# Altium PCB Notecarier-F.PcbDoc (part 2 of 3)
Units mm, origin at the board's own origin, x right, y up, seen from the top; angles counter-clockwise.
Board outline 50.8 x 103 mm, 4 copper layers (Top Layer, Mid Layer 3, Mid Layer 4, Bottom Layer), stack 1.58 mm thick; 105 components, 115 nets, 561 pads, 506 vias.
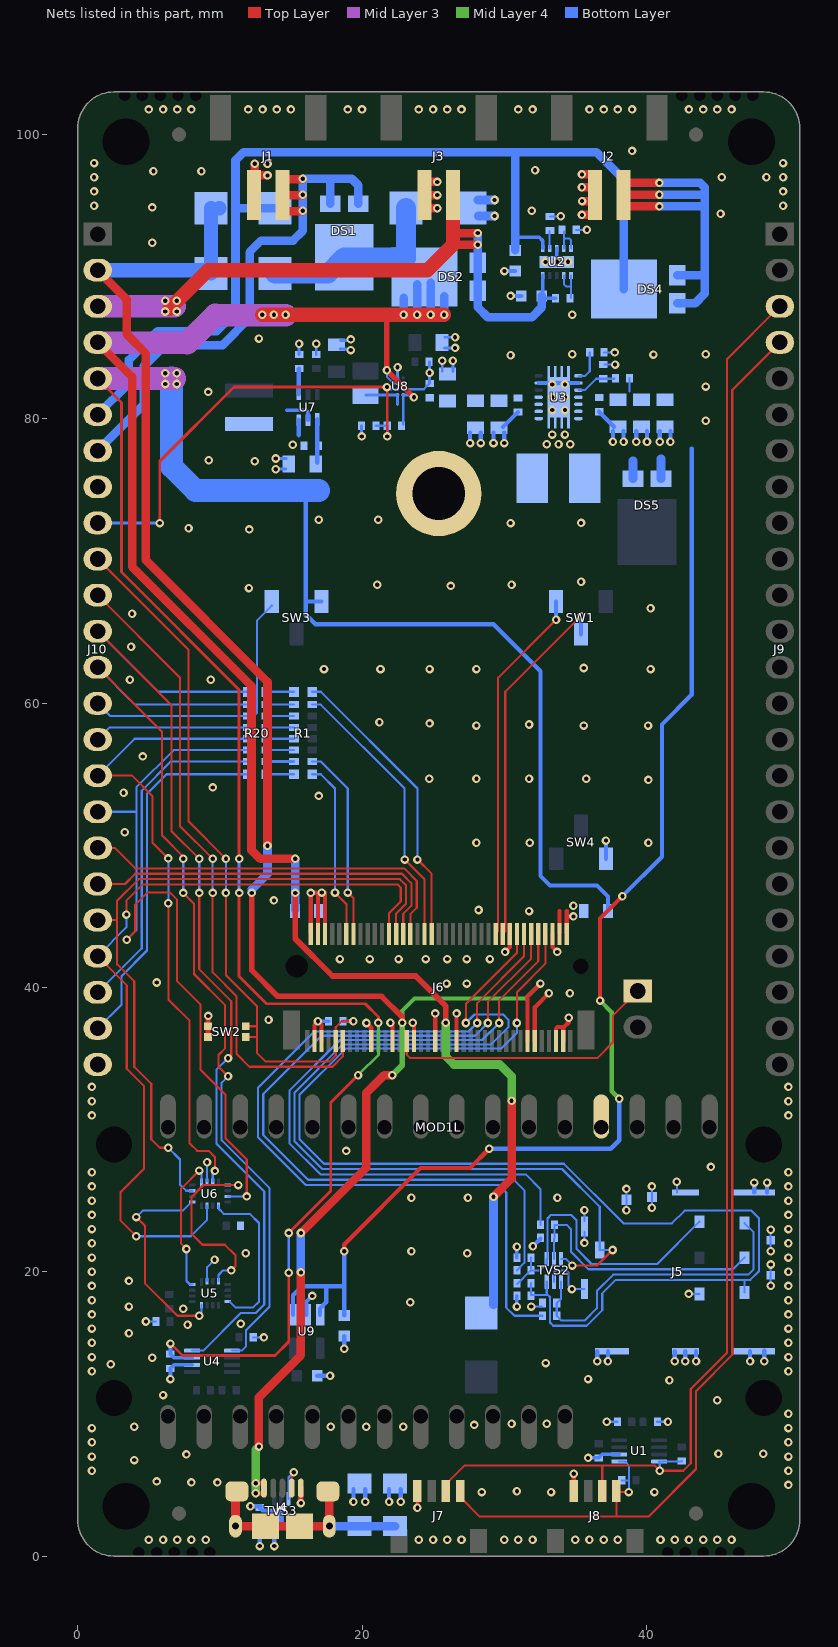
[diagram p4: the nets of this part, all layers, seen from the top]

## Via types
v1: diameter 0.6, hole 0.3, Top Layer to Bottom Layer, tented both sides, 506 vias

## Nets (pads, with @x,y where several pads share a name; then routed paths per layer and width w, separated by ;. In a path a pad name is that pad's centre, name@x,y a point inside that pad or via, vN(x,y) a via of type N, cw(c..) or ccw(c..) an arc to the next point about the centre after c; other vN are vias at no path point) (continued)
GND: C1.1 C2.1 C3.2 C4.2 C5.1 C6.1 C7.1 C8.1 C9.1 C10.1 C11.2 C12.2 C13.2 C14.2 C15.1 C16.1 C17.1 C18.1 C19.1 C20.2 C21.1 C22.2 C23.2 C24.2 C25.1 C26.1 C27.1 C28.1 C29.2 C30.1 C31.1 C32.1 C33.1 C34.1 J1.1 J2.1 J3.1 J4.5 J5.5 J5.8 J5.9 J5.10 J5.11 J5.12 J5.14 J5.15 J5.16 J5.17 J5.18 J5.19 J6.3 J6.5 J6.6 J6.11 J6.18 J6.33 J6.39 J6.45 J6.51 J6.57 J6.71 J6.73 J7.4 J8.4 J10.8 J10.24 MOD1L.4 OBJ1.1 R3.1 R4.1 R5.2 R14.1 R16.2 R17.2 SW2.2 SW4.1 TVS1.2 TVS2.2 TVS3.2 U1.2 U2.3 U2.11 U3.2 U3.13 U3.15 U4.2 U5.2 U6.2 U7.3 U8.B2 U8.D1 U9.2 | length 114.3
  Top Layer w0.3: J6.73@16.65,36.225 16.65,37.375 v1(16.9,37.625) 17.15,37.375 J6.71@17.15,36.225 ; v1(20.311,37.5) 20.65,37.161 J6.57@20.65,36.225 ; J6.51@22.15,36.225 v1@22.15,37.525 ; J6.45@23.65,36.225 v1@23.65,37.525 ; v1(23.9,3.389) J7.4@23.9,4.589 ; J6.39@25.15,36.225 v1(25.15,38.175) ; J6.33@26.65,36.225 v1(26.65,38.175) ; v1(30.061,42.5) 30.4,42.839 J6.18@30.4,43.775 ; J6.11@32.15,36.225 32.15,38.6 v1(33.15,39.6) ; J6.6@33.4,43.775 33.4,42.839 v1(33.739,42.5) ; J6.5@33.65,36.225 33.65,37.1 33.761,37.211 34.211,37.211 34.55,37.55 v1(34.55,37.875) ; J6.3@34.15,36.225 34.15,37.15 ; J8.4@34.9,4.589 v1(34.9,5.789)
  Top Layer w0.35: SW2.2@9.175,36.525 SW2.2@9.175,37.275 v1(9.175,38)
  Top Layer w0.4: v1(15.7,3.725) J4.5@15.7,4.775
  Top Layer w0.6: J1.1@12.45,97.05 v1(12.45,97.95) ; J1.1@12.45,97.125 v1(13.35,97.125) ; J3.1@24.3,94.825 v1(25.3,94.825) ; J3.1@24.3,95.75 v1(25.3,95.75) ; J3.1@24.3,96.675 v1(25.3,96.675) ; v1(35.475,94.35) J2.1@36.55,94.35 ; v1(35.475,96.3) J2.1@36.55,96.3 ; v1(35.475,97.2) J2.1@36.55,97.2 ; v1(35.483,95.325) J2.1@36.558,95.325
  Bottom Layer w0.15: v1(4.8,16.5) C15.1@5.5,16.5 ; U5.2@9.1,19.345 9.1,20.32 v1(9.625,20.845) ; U6.2@9.1,26.345 v1(9.1,27.695) ; C14.2@12.35,15.375 v1(13.1,15.375) ; U8.B2@22.9,82.09 24.35,82.09 C26.1@24.75,82.49 ; v1(31.9,17.55) C7.1@32.653,17.55 ; R3.1@33.225,94.25 v1(33.975,94.25) ; TVS2.2@33.5,19.295 33.5,19.95 33.65,20.1 34.35,20.1 34.525,19.925 34.525,19.025 v1(34.77,18.78) J5.14@35.65,18.78 ; R4.1@35.075,93.3 v1(35.825,93.3) ; v1(35.65,22.03) J5.12@35.65,22.78 ; J5.12@35.65,23.58 v1(35.65,24.33) ; C18.1@37.025,84.675 v1(37.775,84.675) ; R14.1@37.05,83.825 v1(37.8,83.825) ; v1(37.225,9.45) C12.2@37.975,9.45 ; v1(38.6,24.325) J5.11@38.6,25.075 v1(38.6,25.825) ; v1(40.4,24.5) J5.10@40.4,25.25 v1(40.4,26) ; R16.2@40.775,9.45 v1(41.525,9.45) ; J5.9@42.15,25.575 v1(42.15,26.325) ; v1(42.98,18.44) J5.5@43.73,18.44 ; v1(48.75,19.01) J5.18@48.75,19.76 v1(48.75,20.51) ; v1(48.75,21.45) J5.19@48.75,22.2 v1(48.75,22.95)
  Bottom Layer w0.2: v1@13.89,76.465 C29.2@14.64,76.465 ; v1(13.925,77.215) C29.2@14.675,77.215 ; R17.2@15.575,84.54 v1(15.575,85.29) ; C28.1@16.775,84.54 v1(16.775,85.29) ; C21.1@18.45,84.915 v1@19.2,84.915 ; C21.1@18.485,85.515 v1@19.235,85.515 ; v1(19.975,78.765) C31.1@19.975,79.515 ; U8.D1@22.5,82.89 v1(22.5,83.64) ; C32.1@24.725,84.015 24.75,83.99 v1(24.75,83.24) C26.1@24.75,82.49 ; C27.1@25.65,83.375 v1@25.65,84.125 ; C20.2@25.8,84.99 v1(26.55,84.99) ; C20.2@25.835,85.74 v1@26.585,85.74 ; C27.1@26.4,83.34 v1(26.4,84.09)
  Bottom Layer w0.25: v1(6.525,12.45) C13.2@6.525,13.2 6.775,13.45 U4.2@8.045,13.45 ; v1(16.9,37.625) C9.1@17.65,37.625 ; v1(30.9,17.55) C5.1@30.9,18.3 ; C8.1@30.9,21 v1(30.9,21.75) ; U3.13@32.425,82.525 U3.2@35.225,82.525 ; v1(33.703,91.047) U2.3@33.703,91.997 ; v1(35.9,6.9) C11.2@36.65,6.9 36.9,7.15 U1.2@38.095,7.15
  Bottom Layer w0.3: v1(12.15,3.5) C3.2@12.9,3.5 ; C3.2@12.8,3.4 13,3.2 14.15,3.2 14.325,3.025 TVS3.2@14.325,2.395 ; U9.2@16.097,16.975 16.097,17.897 v1(16.5,18.3) ; C34.1@16.85,12.675 v1(17.75,12.675) ; v1(18.75,14.575) C33.1@18.75,15.475 ; v1(19.4,3.825) C4.2@19.4,4.701 ; v1(20.225,3.825) C4.2@20.225,4.701 ; v1(21.9,3.825) R5.2@21.9,4.701 ; v1(22.725,3.825) R5.2@22.725,4.701 ; v1(27.6,78.3) C17.1@27.6,79.05 ; v1(28.35,78.3) C17.1@28.35,79.05 ; v1(29.25,78.3) C16.1@29.25,79.05 ; C16.1@29.925,79.425 C30.1@30.975,80.475 ; v1(30,78.3) C16.1@30,79.05 ; v1(30.02,90.4) C1.1@30.77,90.4 ; v1(30.45,88.65) C2.1@31.2,88.65 ; v1(32.025,21.8) C6.1@32.55,22.325 ; v1(36.55,13.7) J5.15@36.55,14.4 ; C25.1@36.675,80.5 C23.2@37.725,79.45 ; SW4.1@37.158,49.056 v1(37.158,50.331) ; v1(37.3,13.7) J5.15@37.3,14.4 ; v1(37.65,78.4) C23.2@37.65,79.15 ; v1(38.4,78.4) C23.2@38.4,79.15 ; v1(39.3,78.4) C24.2@39.3,79.15 ; v1(40.05,78.4) C24.2@40.05,79.15 ; v1(40.95,78.4) C22.2@40.95,79.15 ; v1(41.7,78.4) C22.2@41.7,79.15 ; v1(42,13.7) J5.16@42,14.4 ; v1(42.75,13.7) J5.16@42.75,14.4 ; v1(43.5,13.7) J5.16@43.5,14.4 ; v1(47.3,13.7) J5.17@47.3,14.4 ; J5.8@47.6,25.575 v1(47.6,26.275) ; v1(48.3,13.7) J5.17@48.3,14.45 ; J5.8@48.5,25.575 v1(48.5,26.275)
  Bottom Layer w0.35: 15.55,78.865 U7.3@15.55,79.915
  Bottom Layer w0.6: TVS1.2@28.16,95.4 v1(29.325,95.4) ; TVS1.2@28.165,94.275 v1(29.325,94.275)
  other v1: 5,1.15 6,1.15 7,1.15 8,1.15 9,1.15 24,1.15 25,1.15 26,1.15 27,1.15 30,1.15 31,1.15 32,1.15 35,1.15 36,1.15 37,1.15 38,1.15 41,1.15 42,1.15 43,1.15 44,1.15 45,1.15 46,1.15 28.425,4.5 33.3,4.5 40.575,4.5 30.9,4.55 50,5 8,5.175 9.825,5.175 5.55,5.25 1,6 50,6 3.975,6.75 1,7 50,7 7.65,7.15 45.075,7.2 48.225,7.2 1,8 50,8 1,9 50,9 3.975,9.1 17.8,9.1 20.3,9.1 22.9,9.1 27.9,9.225 30.525,9.3 33,9.3 50,10 45,10.95 6,11.325 41.625,12.375 35.9,12.45 1,13 50,13 2.325,13.5 32.925,13.575 5.25,13.95 1,14 50,14 1,15 50,15 3.6,15.675 1,16 50,16 7.725,16.275 11.475,16.35 1,17 50,17 7.425,17.4 3.6,17.55 23.4,17.85 1,18 50,18 1,19 50,19 3.6,19.35 1,20 50,20 1,21 50,21 11.825,21.3 27.4,21.3 23.475,21.45 1,22 50,22 1,23 50,23 1,24 50,24 1,25 50,25 23.475,25.2 27.45,25.2 33.75,25.2 1,26 50,26 1,27 50,27 44.55,27.375 18.9,28.5 1,31 50,31 1,32 50,32 1,33 50,33 22,37.525 23.575,37.525 13.425,37.725 34.625,39.6 25.95,40.275 27.375,40.275 5.55,40.35 18.45,42 20.55,42 22.575,42 24.475,42 26,42 27.375,42 29,42 31.75,45.375 28.2,45.45 13.8,46.125 28.05,50.175 31.8,50.175 40.15,50.175 3.3,50.925 16.95,53.475 3.225,53.7 9.49,54.075 40.15,54.6 24.725,54.675 28.05,54.675 31.75,54.675 35.775,54.675 4.575,56.25 28.05,58.425 35.6,58.425 40.125,58.425 31.75,58.5 24.75,58.575 21.225,58.65 3.675,61.65 9.35,61.65 17.325,62.4 21.3,62.4 24.75,62.4 28.05,62.4 40.3,62.4 35.6,62.475 3.75,63.975 3.825,66.3 40.3,66.675 12.045,68.1 26.25,68.25 21.075,68.325 30.525,68.325 35.408,68.55 12.075,72.225 7.8,72.3 30.45,72.675 35.408,72.68 16.95,72.9 21.15,72.9 13.925,76.465 12.45,77.025 9.225,77.1 15.125,78.19 33,78.225 33.825,78.225 34.65,78.225 33.375,78.9 34.275,78.9 44.175,79.875 33.375,80.625 34.275,80.625 33.375,81.525 34.275,81.525 9.175,81.9 44.175,82.275 33.375,82.425 34.275,82.425 25.65,84.09 30.45,84.47 40.5,84.525 34.8,84.545 44.175,84.545 19.2,84.84 19.2,85.59 12.75,85.65 26.55,85.74 34.8,87.32 32.906,91.044 34.5,91.05 5.25,92.4 45.225,94.425 31.95,94.65 5.25,94.875 1.15,95 49.625,95 1.15,96 49.625,96 1.15,97 45.3,97 48.45,97 49.625,97 5.325,97.425 8.7,97.425 32.175,97.5 13.35,97.95 1.15,98 49.625,98 39,98.85 5,101.775 6,101.775 7,101.775 8,101.775 12,101.775 13,101.775 14,101.775 15,101.775 19,101.775 20,101.775 24,101.775 25,101.775 26,101.775 27,101.775 31,101.775 32,101.775 36,101.775 37,101.775 38,101.775 39,101.775 43,101.775 44,101.775 45,101.775 46,101.775
N_ATTN: J10.14 R20.6 SW3.1 | length 19.6
  Bottom Layer w0.15: J10.14@1.4,59.98 2.28,59.1 R20.6@11.975,59.1 12.4,59.1 12.6,59.3 12.6,65.8 SW3.1@13.65,66.85
N_AUX1: J6.46 J10.18 | length 27.3
  Top Layer w0.15: J10.18@1.4,49.82 2.605,49.82 4.05,48.375 22.966,48.375 23.85,47.491 23.85,45.6 23.4,45.15 J6.46@23.4,43.775
N_AUX2: J6.48 J10.19 | length 26.4
  Top Layer w0.15: J10.19@1.4,47.28 3.33,47.28 4.05,48 22.811,48 23.475,47.336 23.475,45.75 22.9,45.175 J6.48@22.9,43.775
N_AUX3: J6.50 J10.20 U6.15 | length 49.4
  Top Layer w0.15: J10.20@1.4,44.74 2.735,44.74 ; v1(6.375,28.725) 5.775,28.725 5.175,29.325 5.175,33.225 3.975,34.425 3.975,40.425 2.775,41.625 2.775,46.115 4.285,47.625 22.655,47.625 23.1,47.18 23.1,45.9 22.4,45.2 J6.50@22.4,43.775
  Bottom Layer w0.15: v1(6.375,28.725) 7.2,27.9 7.2,26.125 7.625,25.7 U6.15@8.055,25.7
N_AUX4: J6.52 J10.21 U6.11 | length 56.9
  Top Layer w0.15: J10.21@1.4,42.2 3.45,40.15 3.45,34.275 4.65,33.075 4.65,27.225 3,25.575 3,23.625 v1(4.125,22.5) ; v1(3.425,45.125) 3.425,46.1 4.575,47.25 22.5,47.25 22.725,47.025 22.725,46.05 21.9,45.225 J6.52@21.9,43.775
  Bottom Layer w0.15: J10.21@1.4,42.2 3.425,44.225 v1(3.425,45.125) ; v1(4.125,22.5) 7.95,22.5 9.1,23.65 U6.11@9.1,24.655
N_AUX_EN: J10.15 R20.5 | length 10.9
  Bottom Layer w0.15: J10.15@1.4,57.44 2.26,58.3 R20.5@11.975,58.3
N_AUX_RX: J10.16 R20.4 U6.3 | length 45.5
  Top Layer w0.15: J10.16@1.4,54.9 3.825,54.9 5.25,53.475 5.25,50.2 v1(6.375,49.075) ; v1(6.375,45.925) 6.375,39.15 7.875,37.65 7.875,29.025 8.4,28.5 9.225,28.5 9.65,28.075 v1(9.65,27.095)
  Bottom Layer w0.15: J10.16@1.4,54.9 4,57.5 R20.4@11.975,57.5 ; v1(6.375,45.925) v1(6.375,49.075) ; U6.3@9.5,26.345 v1@9.5,27.095
N_AUX_TX: J10.17 R20.3 U6.7 | length 53.1
  Top Layer w0.15: v1(3.45,43.35) 4.05,43.95 4.05,45.825 4.9,46.675 6.5,46.675 6.975,46.2 6.975,40.475 8.625,38.825 8.625,34.23 10.395,32.46 10.395,29.4 11.895,27.9 v1(11.895,25.3)
  Bottom Layer w0.15: J10.17@1.4,52.36 4.06,52.36 ; v1(3.45,43.35) 4.125,44.025 4.125,54.075 6.75,56.7 R20.3@11.975,56.7 ; U6.7@10.545,25.3 v1(11.895,25.3)
N_BOOT: J6.65 J10.11 | length 45.5
  Top Layer w0.15: J10.11@1.4,67.6 7.2,61.8 7.2,51.34 v1(9.49,49.05) ; v1(9.49,46.65) 9.49,41.06 11.175,39.375 11.175,35.325 12.075,34.425 17.925,34.425 18.65,35.15 J6.65@18.65,36.225
  Bottom Layer w0.15: v1(9.49,46.65) v1(9.49,49.05)
N_EN: C31.2 J10.9 R19.1 U8.B1 | length 32.6
  Top Layer w0.2: v1(5.775,72.675) 5.775,77.025 10.99,82.24 v1(21.75,82.24) ; v1(21.775,78.765) v1@21.775,82.215
  Bottom Layer w0.2: J10.9@1.4,72.68 1.405,72.675 v1(5.775,72.675) ; C31.2@20.975,79.515 R19.1@21.775,79.515 v1(21.775,78.765) ; v1@21.75,82.09 U8.B1@22.5,82.09
N_NRST: C9.2 J6.67 J10.10 SW2.1 | length 51.1
  Top Layer w0.15: J10.10@1.4,70.14 7.8,63.74 7.8,51.675 v1(10.425,49.05) ; v1(10.425,46.65) 10.425,40.875 12.6,38.7 12.6,35.4 13.2,34.8 17.725,34.8 18.15,35.225 J6.67@18.15,36.225 18.15,37.2 18.575,37.625 v1(19.4,37.625) ; SW2.1@11.825,36.525 12.6,36.525 ; SW2.1@11.825,37.275 12.6,37.275
  Bottom Layer w0.15: v1(10.425,46.65) v1(10.425,49.05)
  Bottom Layer w0.25: C9.2@18.65,37.625 v1(19.4,37.625)
N_RX: J10.22 R20.2 | length 23.8
  Bottom Layer w0.15: J10.22@1.4,39.66 4.5,42.76 4.5,53.85 6.55,55.9 R20.2@11.975,55.9
N_SCL: J10.12 R20.8 U4.4 | length 71.8
  Top Layer w0.15: J10.12@1.4,65.06 6.6,59.86 6.6,51 v1(8.55,49.05) ; v1(8.55,46.65) 8.55,41.29 10.8,39.04 10.8,35.175 v1@10.65,35.025
  Bottom Layer w0.15: J10.12@1.4,65.06 5.66,60.8 R20.8@11.975,60.8 ; U4.4@8.045,14.45 8.825,14.45 11.475,17.1 12.525,17.1 13.125,17.7 13.125,25.65 9.75,29.025 9.75,34.2 v1(10.575,35.025) ; v1(8.55,46.65) v1(8.55,49.05)
N_SDA: J10.13 R20.7 U4.5 | length 67.1
  Top Layer w0.15: J10.13@1.4,62.52 5.925,57.995 5.925,50.7 v1@7.575,49.05 ; v1(7.425,46.65) 8.175,45.9 8.175,40.951 10.35,38.776 10.35,35.7 9.9,35.25 9.9,34.425 v1(10.575,33.75)
  Bottom Layer w0.15: J10.13@1.4,62.52 4.02,59.9 R20.7@11.975,59.9 ; v1(7.425,46.65) v1(7.425,49.05) ; v1(10.575,33.75) 10.125,33.3 10.125,29.25 13.5,25.875 13.5,17.55 11.85,15.9 11.85,14.75 11.55,14.45 U4.5@10.855,14.45
N_TX: J10.23 R20.1 | length 25.6
  Bottom Layer w0.15: J10.23@1.4,37.12 3.075,38.795 3.075,40.8 4.875,42.6 4.875,53.625 6.25,55 10.825,55 R20.1@11.975,55
N_VIO: C13.1 C19.2 C29.1 F1.1 J10.5 SW3.3 U4.3 U7.1 | length 168.1
  Top Layer w0.2: J10.5@1.4,82.84 3.075,81.165 3.075,69.225 11.355,60.945 v1(11.355,49.05) ; v1(6.525,14.95) 7.375,14.1 13.875,14.1 14.85,15.075 v1(14.85,19.925) ; v1(11.355,46.65) 11.355,40.785 13.29,38.85 20.225,38.85 21.15,37.925 v1(21.15,37.525) ; v1(14.85,22.725) 17.8,25.675 17.8,31.9 v1(19.725,33.825)
  Mid Layer 3 w1.6: J10.5@1.4,82.84 6.825,82.84
  Mid Layer 4 w0.2: v1@19.8,33.9 21.15,35.25 v1(21.15,37.525)
  Bottom Layer w0.2: v1(11.355,46.65) v1(11.355,49.05) ; v1(14.85,19.925) v1(14.85,22.725)
  Bottom Layer w0.25: v1(6.525,14.95) C13.1@6.525,14.2 6.775,13.95 U4.3@8.045,13.95
  Bottom Layer w0.3: 16.05,74.625 16.05,66.225 16.725,65.55 29.25,65.55 32.55,62.25 32.55,47.85 33.225,47.175 36.525,47.175 37.3,46.4 F1.1@37.3,45.375 ; 16.075,67.15 SW3.3@17.15,67.15
  Bottom Layer w0.35: C29.1@16.85,76.94 U7.1@16.85,79.965
  Bottom Layer w1.6: 6.6,82.875 6.6,76.65 8.285,74.965 16.95,74.965
  other v1: 6.15,82.455 6.975,82.455 6.15,83.205 6.975,83.205
NetC4_1: C4.1 J4.S@11.1,2.1 J4.S@11.2,4.55 J4.S@13.2,2.1 J4.S@15.6,2.1 J4.S@17.6,4.55 J4.S@17.7,2.1 R5.1 | length 16.1
  Top Layer w0.6: J4.S@11.1,4.472 J4.S@11.1,2.1 J4.S@13.2,2.1 J4.S@15.6,2.1 J4.S@17.7,2.1 17.7,4.45 J4.S@17.6,4.55
  Bottom Layer w0.6: J4.S@17.7,2.1 C4.1@19.826,2.1 R5.1@22.326,2.1
NetC6_2: C6.2 J5.2 R7.2 TVS2.5 | length 18.3
  Bottom Layer w0.15: TVS2.5@33.5,20.905 C6.2@33.5,22.35 ; C6.2@33.55,22.4 R7.2@33.55,23.3 34.4,23.3 34.7,23 34.7,21.4 35.925,20.175 46.095,20.175 J5.2@46.9,20.98
NetC7_2: C7.2 J5.3 R8.2 TVS2.1 | length 22.2
  Bottom Layer w0.15: TVS2.1@34,19.295 34,18.1 C7.2@33.7,17.8 R8.2@33.7,16.9 34.025,16.575 35.67,16.575 36.525,17.43 36.525,18.65 37.675,19.8 47.175,19.8 47.55,20.175 47.55,22.77 J5.3@46.9,23.42
NetC8_2: C8.2 J5.7 R6.1 R9.2 TVS2.4 | length 21.3
  Bottom Layer w0.15: R6.1@30.9,19.125 R9.2@31.8,20.025 ; C8.2@31.9,21 R9.2@31.9,20.1 32.55,20.1 33,20.55 TVS2.4@33,20.905 ; TVS2.4@33.05,20.905 33.05,23.75 33.3,24 34.7,24 35.1,23.6 35.1,21.6 36.15,20.55 40.76,20.55 J5.7@43.73,23.52
NetC18_2: C18.2 U3.1 | length 2.3
  Bottom Layer w0.15: U3.1@35.225,83.025 35.7,83.025 36.025,83.35 C18.2@36.025,84.675
NetC22_1: C22.1 C23.1 C24.1 C25.2 C33.2 DS5.1 DS5.2 R13.2 U3.4 U3.5 U9.1 U9.3 | length 90.3
  Top Layer w0.3: v1(18.75,21.45) 18.75,21.925 24.125,27.3 27.6,27.3 v1(28.95,28.65) ; v1(36.75,39.075) 36.75,44.85 v1(38.325,46.425)
  Mid Layer 4 w0.3: v1(36.75,39.075) 37.575,38.25 37.575,32.7 v1(38.1,32.175)
  Bottom Layer w0.15: 38.825,81.925 R13.2@38.825,82.875
  Bottom Layer w0.3: U9.1@15.147,16.975 15.147,18.347 15.775,18.975 17.475,18.975 ; U9.3@17.047,16.975 17.047,17.422 17.475,17.85 17.475,18.975 ; C33.2@18.75,16.925 18.75,18.975 ; v1(18.75,21.45) 18.75,18.975 ; v1(28.95,28.65) 37.5,28.65 38.1,29.25 v1(38.1,32.175) ; v1(38.325,46.425) 41.1,49.2 41.1,58.5 43.2,60.6 43.2,77.925 ; 17.475,18.975 18.75,18.975
  Bottom Layer w0.6: DS5.2@39.065,75.8 39.065,77.055 ; DS5.1@41.035,75.8 41.035,77.205
NetDS4_1: DS4.1 DS4.2 J2.2 | length 28.6
  Top Layer w0.6: J2.2@38.425,94.95 v1(40.925,94.95) ; J2.2@38.425,95.775 v1(40.925,95.775) ; J2.2@38.425,96.6 v1(40.925,96.6)
  Bottom Layer w0.6: v1(40.925,94.95) 44.1,94.95 ; v1(40.925,95.775) 44.025,95.775 ; v1(40.925,96.6) 43.8,96.6 44.1,96.3 44.1,88.8 43.44,88.14 DS4.1@42.175,88.14 ; DS4.2@42.175,90.11 43.99,90.11
NetF2_2: F2.2 J6.70 J6.72 J6.74 | length 10.4
  Top Layer w0.3: J6.74@16.4,43.775 v1(16.4,46.65) ; v1@16.425,46.675 v1(17.175,46.675) 17.4,46.675 J6.70@17.4,43.775 ; J6.72@16.9,43.775 v1@16.9,46.65
  Bottom Layer w0.3: v1(16.4,46.65) v1@17.15,46.65
NetJ4_4: J4.4 TVS3.6 | length 3.2
  Top Layer w0.15: J4.4@15.05,4.775 15.05,5.75 v1(15.2,5.9)
  Bottom Layer w0.15: TVS3.6@14.825,4.005 14.825,5.525 v1(15.2,5.9)
NetJ6_20: J6.20 SW1.2 | length 25.9
  Top Layer w0.15: J6.20@29.9,43.775 30.075,43.95 30.075,60.8 v1(35.4,66.125)
  Bottom Layer w0.3: SW1.2@35.4,64.85 v1(35.4,66.125)
NetJ6_22: J6.22 SW1.1 | length 25.1
  Top Layer w0.15: J6.22@29.4,43.775 29.575,43.95 29.575,61.8 v1(33.65,65.875)
  Bottom Layer w0.3: v1(33.65,65.875) SW1.1@33.65,67.15
NetJ6_40: J6.40 R1.9 | length 20.9
  Top Layer w0.15: v1(23.9,49) 24.896,48.004 J6.40@24.896,43.779
  Bottom Layer w0.15: R1.9@16.5,60.8 17.1,60.8 23.9,54 v1(23.9,49)
NetJ6_42: J6.42 R1.10 | length 19.7
  Top Layer w0.15: v1(23,49) 24.392,47.608 J6.42@24.392,43.783
  Bottom Layer w0.15: R1.10@16.5,59.9 17.1,59.9 23,54 v1(23,49)
NetL1_1: L1.1 U7.2 | length 2.1
  Bottom Layer w0.25: 14.7,80.615 16.075,80.615 16.2,80.49 U7.2@16.2,79.915
NetL2_1: L2.1 U3.6 U3.7
NetL2_2: L2.2 U3.8 U3.9
NetL3_2: L3.2 U8.A1 | length 2.9
  Bottom Layer w0.15: L3.2@20.25,81.655 L3.2@20.285,81.69
  Bottom Layer w0.2: L3.2@20.285,81.69 U8.A1@22.5,81.69 22.5,81.015
NetR1_1: R1.1 R20.16 | length 1.9
  Bottom Layer w0.15: R20.16@13.275,55 R1.1@15.2,55
NetR1_2: R1.2 R20.15 | length 1.9
  Bottom Layer w0.2: R20.15@13.275,55.9 R1.2@15.2,55.9
NetR1_3: R1.3 R20.14 | length 1.9
  Bottom Layer w0.15: R20.14@13.275,56.7 R1.3@15.2,56.7
NetR1_4: R1.4 R20.13 | length 1.9
  Bottom Layer w0.15: R20.13@13.275,57.5 R1.4@15.2,57.5
NetR1_5: R1.5 R20.12 | length 1.9
  Bottom Layer w0.15: R20.12@13.275,58.3 R1.5@15.2,58.3
NetR1_6: R1.6 R20.11 | length 1.9
  Bottom Layer w0.15: R20.11@13.275,59.1 R1.6@15.2,59.1
NetR1_7: R1.7 R20.10 | length 1.9
  Bottom Layer w0.15: R20.10@13.275,59.9 R1.7@15.2,59.9
NetR1_8: R1.8 R20.9 | length 1.9
  Bottom Layer w0.15: R20.9@13.275,60.8 R1.8@15.2,60.8
NetR2_1: R2.1 U2.6 U2.7 | length 2.8
  Bottom Layer w0.15: U2.7@34.203,90.097 34.203,89.472 34.35,89.325 34.703,89.325 ; R2.1@34.703,88.5 U2.6@34.703,90.097
NetR3_2: R3.2 U2.2 | length 1.2
  Bottom Layer w0.15: U2.2@33.203,91.997 R3.2@33.203,93.228
NetR4_2: R4.2 U2.4 U2.5 | length 2.3
  Bottom Layer w0.15: U2.4@34.203,91.997 34.203,92.7 ; R4.2@34.203,93.172 34.203,92.7 ; U2.5@34.703,91.997 34.703,92.572 34.575,92.7 34.203,92.7
NetR13_1: R13.1 R14.2 U3.3 | length 2.9
  Bottom Layer w0.15: U3.3@35.225,82.025 35.675,82.025 36.475,82.825 R14.2@36.975,82.825 R13.1@37.775,82.825
NetR17_1: R17.1 U7.4 | length 1.8
  Bottom Layer w0.3: R17.1@15.55,83.515 R17.1@15.575,83.54
  Bottom Layer w0.35: U7.4@15.55,81.745 R17.1@15.55,83.515
NetU5_4: U5.4 U6.5 | length 13.3
  Top Layer w0.15: v1(10.8,20.095) 11.1,20.395 11.1,21.15 10.35,21.9 8.775,21.9 8,22.675 8,25.25 8.85,26.1 v1(11.295,26.1)
  Bottom Layer w0.15: U5.4@9.9,19.345 9.9,19.775 10.22,20.095 v1(10.8,20.095) ; U6.5@10.545,26.1 v1(11.295,26.1)
NetU5_8: U5.8 U6.9 | length 11.4
  Bottom Layer w0.15: U6.9@9.9,24.655 9.9,24.45 10.275,24.075 12.1,24.075 12.75,23.425 12.75,17.9 12.325,17.475 11.125,17.475 U5.8@10.7,17.9
NetU5_12: U5.12 U6.13 | length 14.7
  Top Layer w0.15: v1(4.125,23.85) 4.725,23.25 4.725,19.2 7.02,16.905 v1(8.55,16.905)
  Bottom Layer w0.15: v1(4.125,23.85) 4.575,24.3 7.38,24.3 U6.13@7.98,24.9 ; v1@8.7,16.905 U5.12@8.7,17.655
NetU5_16: U5.16 U6.1 | length 9.7
  Top Layer w0.15: v1(7.65,21.6) 7.275,21.975 7.275,25.845 v1(8.55,27.12)
  Bottom Layer w0.15: v1(7.65,21.6) 7.65,19.35 7.9,19.1 U5.16@8.055,19.1 ; U6.1@8.7,26.295 v1@8.7,27.045
RTX: J6.47 J11.1 | length 20.4
  Top Layer w0.15: J6.47@23.15,36.225 23.15,35.275 23.4,35.025 36.55,35.025 37.65,36.125 37.65,38.007 J11.1@39.394,39.751
RX_P: J6.62 R1.15 | length 13.7
  Top Layer w0.15: v1(19,46.675) 19.4,46.275 J6.62@19.4,43.775
  Bottom Layer w0.15: R1.15@16.5,55.9 17.1,55.9 19,54 v1(19,46.675)
SIM_CLK: J6.14 R8.1 | length 58.1
  Top Layer w0.15: v1(28.096,37.5) 28.096,38.896 31.4,42.2 J6.14@31.4,43.53
  Bottom Layer w0.15: v1(28.096,37.5) 27.496,36.9 16.65,36.9 12.675,32.925 12.675,29.475 16.05,26.1 29.625,26.1 30.15,25.575 30.15,17.475 30.725,16.9 R8.1@32.7,16.9
SIM_IO: J6.12 R9.1 | length 54
  Top Layer w0.15: v1(28.858,37.5) 28.858,38.983 31.9,42.025 J6.12@31.9,43.688
  Bottom Layer w0.15: v1(28.858,37.5) 27.958,36.6 17.15,36.6 13.05,32.5 13.05,29.625 16.2,26.475 30.675,26.475 31.425,25.725 31.425,20.625 R9.1@30.9,20.1
SIM_NPRESENT: J5.13 J6.16 TVS2.6 | length 63.8
  Top Layer w0.15: v1(27.311,37.5) 27.311,38.861 30.9,42.45 J6.16@30.9,43.912 ; v1(34.8,20.435) 36.53,20.435 v1(37.625,21.53)
  Bottom Layer w0.15: v1(27.311,37.5) 27.911,38.1 29.925,38.1 30.3,37.725 30.3,37.2 29.1,36 18.65,36 15.246,32.596 15.246,29.179 17.2,27.225 34.075,27.225 36.725,24.575 J5.13@36.725,21.53 v1(37.625,21.53) ; TVS2.6@34,20.905 34.33,20.905 v1(34.8,20.435)
SIM_RST: J6.10 R7.1 | length 49.3
  Top Layer w0.15: v1(29.643,37.5) 29.643,39.093 32.4,41.85 J6.10@32.4,43.688
  Bottom Layer w0.15: v1(29.643,37.5) 28.443,36.3 18.45,36.3 14.893,32.743 14.893,29.032 17.075,26.85 31.525,26.85 32.55,25.825 R7.1@32.55,23.3
SIM_VCC: C5.2 J5.1 J6.8 R6.2 TVS2.3 | length 90
  Top Layer w0.15: v1(30.9,37.5) 30.9,39.675 32.9,41.675 J6.8@32.9,43.775
  Bottom Layer w0.15: v1(30.9,37.5) 30.9,36.825 29.775,35.7 18.85,35.7 15.6,32.45 15.6,29.325 17.325,27.6 34.2,27.6 38.4,23.4 41.8,23.4 42.7,24.3 47.4,24.3 47.925,23.775 47.925,20.025 47.325,19.425 46.9,19.425 ; R6.2@31.9,19.2 31.9,18.375 33.075,18.375 33.225,18.225 33.225,16.425 33.45,16.2 35.8,16.2 36.9,17.3 36.9,18.475 37.85,19.425 46.9,19.425 ; 33,18.375 TVS2.3@33,19.295 ; J5.1@46.9,18.54 46.9,19.425
SW_SCL: J7.1 J8.1 J9.4 R15.1 U1.1 | length 107
  Top Layer w0.15: J7.1@26.9,5 J7.1@26.9,4.589 26.9,4.15 28.275,2.775 40.15,2.775 43.5,6.125 43.5,11.6 46.05,14.15 46.05,82.03 J9.4@49.4,85.38 ; 37.9,2.8 J8.1@37.9,4.589 37.989,4.5 v1(38.775,4.5)
  Bottom Layer w0.15: U1.1@38.095,6.65 38.5,6.65 38.775,6.375 38.775,5.325 ; R15.1@38.275,5.325 38.775,5.325 ; v1(38.775,4.5) 38.775,5.325
SW_SDA: J7.2 J8.2 J9.3 R10.1 U1.8 | length 105.9
  Top Layer w0.15: J7.2@26.1,5.25 27.225,6.375 40.575,6.375 v1(40.95,6) 42.6,6 43.125,6.525 43.125,11.755 45.675,14.305 45.675,84.195 J9.3@49.4,87.92 ; J8.2@36.9,4.589 36.9,6.375
  Bottom Layer w0.15: U1.8@40.905,6.65 42.475,6.65 R10.1@42.5,6.675 ; v1(40.95,6) U1.8@40.95,6.605
TX_P: J6.64 R1.16 | length 12.6
  Top Layer w0.15: v1(18.1,46.675) 18.9,45.875 J6.64@18.9,43.775
  Bottom Layer w0.15: R1.16@16.5,55 17.1,55 18.1,54 v1(18.1,46.675)
V+: DS1.1 DS1.2 J1.2 J10.7 | length 40.3
  Top Layer w0.6: J1.2@14.4,94.625 v1@15.825,94.625 ; J1.2@14.4,95.75 v1@15.825,95.75 ; J1.2@14.4,96.875 v1@15.825,96.875
  Bottom Layer w0.6: J10.7@1.4,77.76 4.65,81.01 4.65,83.7 6.135,85.185 10.185,85.185 12.09,87.09 12.09,91.74 12.9,92.55 15.15,92.55 15.825,93.225 v1(15.825,96.9) 19.275,96.9 19.735,96.44 DS1.1@19.735,95.125 ; DS1.2@17.765,95.125 17.765,96.89
  other v1: 15.825,94.65 15.825,95.775
VBAT: C2.2 DS2.1 DS2.2 J3.2 J10.3 R2.2 U2.10 | length 46.6
  Top Layer w0.6: 26.4,92.25 v1(28.15,92.25) ; 26.4,93.075 v1(28.15,93.075)
  Top Layer w1: 6.45,87.75 9.16,90.46 24.61,90.46 26.4,92.25 J3.2@26.4,94.625
  Mid Layer 3 w1.6: J10.3@1.4,87.92 6.825,87.92
  Bottom Layer w0.25: C2.2@32.65,88.5 R2.2@33.625,88.5 ; C2.2@32.703,88.703 U2.10@32.703,90.097
  Bottom Layer w0.6: v1(28.15,93.075) DS2.2@28.15,90.985 DS2.1@28.15,89.015 28.15,87.846 28.846,87.15 31.95,87.15 32.65,87.85 32.65,88.5 C2.2@32.65,88.65
  other v1: 6.15,87.555 6.975,87.555 6.15,88.305 6.975,88.305
VIO_P: F1.2 J6.2 J6.4 | length 3.2
  Top Layer w0.3: J6.4@33.9,43.775 33.9,45.375 ; J6.2@34.4,43.775 34.4,45.375
  other v1: 34.875,45 34.875,45.75
VMAIN: C16.2 C17.2 C26.2 C27.2 C30.2 DS1.3 DS2.3 DS6.1 DS7.1 F2.1 J10.4 R19.2 TVS1.1 U3.10 U3.11 U8.A2 U8.C1 | length 146
  Top Layer w0.4: v1(15.3,46.65) 15.3,43.425 17.925,40.8 23.775,40.8 25.9,38.675 v1(25.9,37.525) ; 21.75,87.32 v1(21.75,83.415) v1(23.65,81.515)
  Top Layer w0.6: J10.4@1.4,85.38 3.825,82.955 3.825,69.6 12.225,61.2 12.225,49.65 12.825,49.05 v1(15.3,49.05) ; v1(29.25,25.275) 30.525,26.55 v1(30.525,32.025)
  Top Layer w1: v1(12.975,87.32) 21.75,87.32 v1(25.775,87.32)
  Mid Layer 3 w1.6: J10.4@1.4,85.38 7.706,85.345 9.698,87.316 v1@14.625,87.288
  Mid Layer 4 w0.6: v1(25.9,37.525) 25.9,35.15 26.47,34.58 29.695,34.58 30.525,33.75 v1(30.525,32.025)
  Bottom Layer w0.15: v1(21.75,83.415) 21.75,82.965 22.225,82.49 U8.C1@22.5,82.49
  Bottom Layer w0.2: R19.2@22.9,79.64 U8.A2@22.9,81.69 v1@23.7,81.69
  Bottom Layer w0.6: F2.1@15.3,45.475 v1(15.3,49.05) ; v1(22.925,87.32) DS2.3@22.925,88.525 ; v1(23.875,87.32) DS2.3@23.875,89.475 ; v1(24.825,87.32) DS2.3@24.825,89.575 ; v1(25.775,87.32) DS2.3@25.775,88.625 ; DS6.1@29.25,17.675 v1(29.25,25.275)
  Bottom Layer w1.4: DS7.1@13.875,90.225 17.6,90.225 DS1.3@18.75,91.375 DS2.3@23.025,91.375 ; DS2.3@23.1,91.3 TVS1.1@23.1,94.84
  other v1: 13.8,87.32 14.625,87.32
VSOLAR: C1.2 DS3.1 DS4.3 J10.6 U2.1 | length 72.3
  Bottom Layer w0.25: 30.77,92.775 32.475,92.775 32.703,92.547 U2.1@32.703,91.997
  Bottom Layer w0.6: J10.6@1.4,80.3 3.6,82.5 3.6,84.15 5.625,86.175 9.775,86.175 11.1,87.5 11.1,98.2 11.675,98.775 36.475,98.775 38.425,96.825 DS4.3@38.425,89.125 ; 11.125,94.825 DS3.1@13.875,94.825 ; C1.2@30.77,91.85 30.77,92.775 30.77,98.4
VUSB: C3.1 DS3.2 DS7.2 J4.1 J6.13 J10.2 TVS3.3 | length 137.7
  Top Layer w0.3: v1(12.525,4.425) J4.1@13.1,4.425 ; v1(12.525,5.125) J4.1@13.1,5.125 ; J6.13@31.65,36.225 31.65,39.375 v1(32.55,40.275)
  Top Layer w0.4: v1(12.25,46.65) 12.25,41.2 14.075,39.375 21.375,39.375 22.825,37.925 v1(22.825,37.525)
  Top Layer w0.6: J10.2@1.4,90.46 3.45,88.41 3.45,85.95 4.8,84.6 4.8,70.05 13.35,61.5 v1(13.35,49.97) ; v1(12.75,7.7) 12.75,11.175 15.7,14.125 v1(15.7,19.95) ; v1(15.7,22.725) 20.311,27.336 20.311,32.588 21.548,33.825 v1(22.125,33.825)
  Mid Layer 4 w0.3: v1(22.825,37.525) 22.825,38.35 23.7,39.225 31.5,39.225 v1(32.55,40.275)
  Mid Layer 4 w0.4: v1(22.125,33.825) 22.825,34.525 v1(22.825,37.525)
  Mid Layer 4 w0.6: v1(12.525,4.425) v1(12.525,5.125) 12.525,7.475 v1(12.75,7.7)
  Bottom Layer w0.3: v1(12.8,0.7) C3.1@12.8,2.4 ; v1(13.825,0.7) TVS3.3@13.825,2.395
  Bottom Layer w0.6: v1(12.25,46.65) 12.25,46.9 13.35,48 v1(13.35,49.97) ; v1(15.7,19.95) v1(15.7,22.725)
  Bottom Layer w1: J10.2@1.4,90.46 9.14,90.46 DS7.2@9.375,90.225 DS3.2@9.375,94.825
pads on no net: FD1.1 FD2.1 FD3.1 FD4.1 FD5.1 FD6.1 FD7.1 FD8.1 J1.M J2.M J3.M J4.S@11.1,2.1 J4.S@17.7,2.1 J5.6 J6. J6.1 J6.15 J6.17 J6.19 J6.21 J6.23 J6.24 J6.25 J6.26 J6.27 J6.28 J6.29 J6.30 J6.31 J6.35 J6.37 J6.44 J6.53 J6.55 J6.59 J6.61 J6.63 J6.66 J6.68 J6.69 J6.75 J6.AH J7.M J8.M SW1.3 TVS3.1 U2.9 U3.14 U8.D2 U9.4

## Polygon pours and split planes (outlines as drawn)
GND on Top Layer "Top Layer-GND" (solid, remove dead copper, pour order 37): 0,0 50.8,0 50.8,103 0,103
GND on Bottom Layer "Bottom Layer-GND" (solid, remove dead copper, pour order 39): 0,0 50.8,0 50.8,103 0,103
GND on Mid Layer 3 "Mid Layer 3-GND" (solid, remove dead copper, pour order 41): 0,0 50.8,0 50.8,103 0,103
GND on Mid Layer 4 "Mid Layer 4-GND" (solid, remove dead copper, pour order 43): 0,0 50.8,0 50.8,103 0,103

## Keep-outs
Keep-Out Layer:
  circle w0.2: c35.4,41.5 r0.55
  circle w0.2: c15.4,41.5 r0.8
  circle w0.2: c2.54,28.96 r1.5
  circle w0.2: c48.266,11.116 r1.5
  circle w0.2: c48.266,28.96 r1.5
  circle w0.2: c3.4,99.5 r1.9
  circle w0.2: c47.4,99.5 r1.9
  circle w0.2: c2.546,11.116 r1.5
  circle w0.2: c3.4,3.5 r1.9
  circle w0.2: c47.4,3.5 r1.9
  lines w0.2: 0,2.54 ccw(c2.54,2.54) 2.54,0 48.26,0 ccw(c48.26,2.54) 50.8,2.54 50.8,100.46 ccw(c48.26,100.46) 48.26,103 2.54,103 ccw(c2.54,100.46) 0,100.46 0,2.54

## Other copper
Top Layer:
  region net VIO_P: 35.175,46.05 33.703,46.05 33.703,44.7 35.175,44.7
Mid Layer 4:
  region net VUSB: 14.1,0.375 12.525,0.375 12.525,3.075 12.675,3.225 12.675,3.775 12.225,4.225 12.225,5.4 14.1,5.4
Bottom Layer:
  rectangle net NetC22_1: 38.325,76.725 43.2,77.625
  rectangle net F_BAT: 39,68.175 41.1,70.725
  region net 1V8: 20.55,83.94 17.775,83.94 17.775,82.815 20.55,82.815
  region net VIO_P: 36.075,46.05 34.575,46.05 34.575,44.7 36.075,44.7
  rectangle net NetF2_2: 16.65,45.825 17.325,46.675
  pour cut-out: 13.875,82.59 10.25,82.59 10.25,78.99 13.875,78.99
  region net N_VIO: 18.975,82.465 17.32,82.465 17.32,79.41 17.15,79.24 16.55,79.24 16.55,77.553 16.55,74.14 18.975,74.14
  region net 1V8: 18.975,82.765 18.975,84.265 17.675,84.265 17.225,83.815 16.025,83.815 16.025,82.765
  region net GND: 16.4,77.815 16.4,79.24 15.35,79.24 14.675,78.565 13.625,78.565 13.625,77.815
  region net 1V8: 10.288,81.49 13.775,81.49 14.35,80.915 15.05,80.915 15.05,82.84 10.288,82.84
  region net NetL1_1: 10.288,80.14 13.775,80.14 14.375,80.74 15.05,80.74 15.05,79.24 14.6,78.79 10.288,78.79
  region net 1V8: 19.35,82.815 19.35,84.245 19.725,84.62 19.725,85.965 24.225,85.965 24.225,84.535 23.855,84.165 21.525,84.165 21.15,83.79 21.15,82.815
  region net NetL3_2: 19.35,80.115 19.35,82.24 21.15,82.24 21.15,81.765 22.05,81.765 22.05,81.521 22.331,81.24 22.6,81.24 22.6,80.115
  region net VMAIN: 22.8,80.07 22.8,81.24 23.1,81.24 23.325,81.465 23.325,81.865 26.925,81.865 26.925,80.3 26.695,80.07
  region net NetC22_1: 34.875,81.675 35.85,81.675 36.45,82.275 43.35,82.275 43.35,77.55 42.3,77.55 42.3,80.325 37.725,80.325 37.125,80.925 34.875,80.925
  region net NetL2_1: 34.875,80.7 34.875,79.5 35.325,79.05 35.325,74.1 36.975,74.1 36.975,79.725 36.825,79.875 36.2,79.875 36,80.075 36,80.7
  region net NetL2_2: 32.775,80.7 32.775,79.5 32.325,79.05 32.325,74.1 30.675,74.1 30.675,79.725 30.825,79.875 31.45,79.875 31.65,80.075 31.65,80.7
  region net GND: 33.135,80.1 34.515,80.1 34.515,79.445 35.025,78.935 35.025,77.85 32.625,77.85 32.625,78.935 33.135,79.445
  region net VMAIN: 32.775,81.675 31.9,81.675 31.5,82.09 27.15,82.09 26.925,81.865 26.925,80.3 29.925,80.3 30.525,80.9 32.775,80.9
  pour cut-out: 30.9,73.875 36.725,73.875 36.725,77.575 30.9,77.575
  pour cut-out: 21.15,83.94 19.35,83.94 19.35,81.09 21.15,81.09

## Silkscreen, mask and mechanical layers (free items; w line width, h text height)
Top Overlay:
  drawing of 7 lines, arcs and shapes, not listed
  text "+" at 15.7,95.1 h3 r270
  text "+" at 27.7,95.1 h3 r270
  text "+" at 39.7,95.1 h3 r270
  text "-" at 9.7,93.7 h3
  text "-" at 21.7,93.7 h3
  text "-" at 33.7,93.7 h3
  text "F_3V3" at 3.375,92.475 h2.29
  text "F_NRST" at 41.602,92.432 h2.29
  text "V+" at 9.825,91.925 h2.29
  text "VBAT" at 21.75,91.925 h2.29
  text "SOLAR" at 33.825,91.925 h2.29
  text "VUSB" at 3.402,89.902 h2.29
  text "F_EN" at 43.65,89.86 h2.29
  text "SDA" at 44.275,87.32 h2.29
  text "VBAT" at 3.402,87.288 h2.29
  text "NOTECARRIER-F" at 14.638,86.49 h4
  text "VMAIN" at 3.402,84.748 h2.29
  text "SCL" at 44.475,84.695 h2.29
  text "V1.3" at 22.867,84.306 h4
  text "F_D5" at 43.798,82.278 h2.29
  text "N_VIO" at 3.402,82.209 h2.29
  text "F_D6" at 43.801,79.731 h2.29
  text "VSOLAR" at 3.4,79.669 h2.29
  text "F_D9" at 43.828,77.193 h2.29
  text "V+" at 3.402,77.128 h2.29
  text "F_D10" at 43.174,74.654 h2.29
  text "GND" at 3.375,74.625 h2.29
  text "F_D11" at 43.552,72.113 h2.29
  text "N_EN" at 3.402,72.058 h2.29
  text "F_D12" at 43.18,69.565 h2.29
  text "N_NRST" at 3.402,69.542 h2.29
  text "F_D13" at 43.219,67.039 h2.29
  text "N_BOOT" at 3.402,67.004 h2.29
  text "F_B0" at 43.766,64.494 h2.29
  text "N_SCL" at 3.402,64.462 h2.29
  text "F_TX" at 43.695,61.953 h2.29
  text "N_SDA" at 3.402,61.922 h2.29
  text "F_RX" at 43.646,59.413 h2.29
  text "N_ATTN" at 3.402,59.383 h2.29
  text "F_MISO" at 42.08,56.884 h2.29
  text "AUX_EN" at 3.4,56.849 h2.29
  text "F_MOSI" at 42.104,54.334 h2.29
  text "AUX_RX" at 3.4,54.309 h2.29
  text "F_SCK" at 42.644,51.792 h2.29
  text "AUX_TX" at 3.4,51.769 h2.29
  text "F_A5" at 43.709,49.258 h2.29
  text "AUX1" at 3.4,49.229 h2.29
  text "F_A4" at 43.622,46.713 h2.29
  text "AUX2" at 3.4,46.682 h2.29
  text "F_A3" at 43.725,44.179 h2.29
  text "AUX3" at 3.4,44.149 h2.29
  text "AUX4" at 3.4,41.609 h2.29
  text "F_A2" at 43.687,41.625 h2.29
  text "RTX" at 38,41.4 h1.8
  text "F_A1" at 44.058,39.093 h2.29
  text "N_RX" at 3.402,39.063 h2.29
  text "F_A0" at 43.68,36.554 h2.29
  text "N_TX" at 3.402,36.523 h2.29
  text "CTX" at 38,34.2 h1.8
  text "F_AREF" at 41.629,34.013 h2.29
  text "GND" at 3.375,33.975 h2.29
  text "N_NRST" at 8.05,33.9 h1.8
  text "F_B0" at 5.659,28.16 h2.29 r270
  text "F_TX" at 8.199,28.16 h2.29 r270
  text "F_RX" at 10.748,28.16 h2.29 r270
  text "F_MISO" at 13.279,28.16 h2.29 r270
  text "F_MOSI" at 15.819,28.16 h2.29 r270
  text "F_SCK" at 18.359,28.16 h2.29 r270
  text "F_A5" at 20.899,28.16 h2.29 r270
  text "F_A4" at 23.439,28.16 h2.29 r270
  text "F_A3" at 25.979,28.16 h2.29 r270
  text "F_A2" at 28.519,28.16 h2.29 r270
  text "F_A1" at 31.059,28.16 h2.29 r270
  text "F_A0" at 33.599,28.16 h2.29 r270
  text "GND" at 36.139,28.16 h2.29 r270
  text "F_AREF" at 38.688,28.16 h2.29 r270
  text "F_3V3" at 41.219,28.16 h2.29 r270
  text "F_NRST" at 43.768,28.16 h2.29 r270
  text "F_SDA" at 5.659,18.309 h2.29 r270
  text "F_SCL" at 8.199,17.307 h2.29 r270
  text "F_BAT" at 33.608,17.26 h2.29 r270
  text "F_D5" at 10.739,17.079 h2.29 r270
  text "F_D10" at 18.359,16.968 h2.29 r270
  text "F_D11" at 20.899,16.968 h2.29 r270
  text "F_D13" at 25.979,16.969 h2.29 r270
  text "VUSB" at 28.519,16.969 h2.29 r270
  text "F_D12" at 23.439,16.963 h2.29 r270
  text "F_EN" at 31.068,16.809 h2.29 r270
  text "F_D6" at 13.279,15.896 h2.29 r270
  text "F_D9" at 15.819,15.896 h2.29 r270
  text "NOTECARD USB" at 10.2,5.9 h1.6
  text "QWIIC" at 23.7,5.9 h1.6
  text "QWIIC" at 34.7,5.9 h1.6
Bottom Overlay:
  lines w0.2: 37.875,35.925 37.875,41.025 40.875,41.025 40.875,35.925 37.875,35.925
  text "V+" at 17.441,99.504 h2
  text "VBAT" at 29.406,99.477 h2
  text "SOLAR" at 40.944,99.45 h2
  text "2.5V - 5.5V" at 17.441,97.654 h2
  text "3.3V - 4.2V" at 29.406,97.627 h2
  text "3.5V - 7V" at 40.944,97.6 h2
  text "F_3V3" at 7.875,92.475 h2.29
  text "F_NRST" at 47.398,92.432 h2.29
  text "VUSB" at 7.425,89.875 h2.29
  text "F_EN" at 47.4,89.85 h2.29
  text "SDA" at 47.35,87.32 h2.29
  text "VBAT" at 7.501,87.288 h2.29
  text "VMAIN" at 8.182,84.748 h2.29
  text "SCL" at 47.325,84.695 h2.29
  text "F_D5" at 47.398,82.278 h2.29
  text "N_VIO" at 7.742,82.209 h2.29
  text "F_D6" at 47.398,79.731 h2.29
  text "VSOLAR" at 9.525,79.68 h2.29
  text "F_D9" at 47.398,77.193 h2.29
  text "V+" at 5.165,77.128 h2.29
  text "F_D10" at 47.398,74.654 h2.29
  text "GND" at 6.375,74.625 h2.29
  text "F_D11" at 47.398,72.113 h2.29
  text "N_EN" at 7.288,72.058 h2.29
  text "F_D12" at 47.398,69.565 h2.29
  text "N_NRST" at 9.375,69.542 h2.29
  text "F_D13" at 47.398,67.039 h2.29
  text "N_BOOT" at 9.353,67.004 h2.29
  text "F_B0" at 47.398,64.494 h2.29
  text "N_SCL" at 8.229,64.462 h2.29
  text "N_ATTN" at 11.2,62.3 h1.6 r270
  text "FEATHER_EN" at 18.2,62.3 h1.2
  text "ON" at 18.354,62.3 h1.6 r270
  text "ACTIVE" at 31.2,62.3 h1.6 r270
  text "GPS ANT." at 38.2,62.3 h1.6
  text "PASSIVE" at 38.354,62.3 h1.6 r270
  text "F_TX" at 47.398,61.953 h2.29
  text "N_SDA" at 8.412,61.922 h2.29
  text "F_RX" at 47.398,59.413 h2.29
  text "N_ATTN" at 9.399,59.383 h2.29
  text "F_MISO" at 47.398,56.874 h2.29
  text "AUX_EN" at 9.472,56.849 h2.29
  text "F_MOSI" at 47.398,54.334 h2.29
  text "AUX_RX" at 9.517,54.309 h2.29
  text "F_SCK" at 47.398,51.792 h2.29
  text "AUX_TX" at 9.467,51.769 h2.29
  text "F_A5" at 47.398,49.258 h2.29
  text "AUX1" at 7.099,49.229 h2.29
  text "F_A4" at 47.398,46.713 h2.29
  text "DFU" at 31.2,46.7 h1.6 r270
  text "AUX" at 37.9,46.7 h1.6
  text "NORMAL" at 38.3,46.7 h1.6 r270
  text "AUX2" at 7.47,46.682 h2.29
  text "F_A3" at 47.398,44.179 h2.29
  text "AUX3" at 7.432,44.149 h2.29
  text "AUX4" at 7.535,41.609 h2.29
  text "F_A2" at 47.398,41.625 h2.29
  text "RTX" at 40.725,41.325 h1.8
  text "F_A1" at 47.398,39.093 h2.29
  text "N_RX" at 7.332,39.063 h2.29
  text "F_A0" at 47.398,36.554 h2.29
  text "N_TX" at 7.283,36.523 h2.29
  text "CTX" at 40.65,34.2 h1.8
  text "F_AREF" at 47.398,34.013 h2.29
  text "GND" at 6.375,33.975 h2.29
  text "SIM" at 40.4,26.1 h3
Top Paste:
  rectangle: 11.65,93.75 13.15,97.5
  rectangle: 13.65,93.75 15.15,97.5
  rectangle: 23.65,93.75 25.15,97.5
  rectangle: 25.65,93.75 27.15,97.5
  rectangle: 35.65,93.75 37.15,97.5
  rectangle: 37.65,93.75 39.15,97.5
M4 Enclosure:
  lines w0.2: 3.05,103 ccw(c3.05,104) 3.05,105 ; 4.05,-2 ccw(c4.05,-1) 4.05,0 ; 8.55,103 cw(c8.55,104) 8.55,105 ; 9.55,-2 cw(c9.55,-1) 9.55,0 ; 41.25,-2 ccw(c41.25,-1) 41.25,0 ; 42.25,103 ccw(c42.25,104) 42.25,105 ; 46.75,-2 cw(c46.75,-1) 46.75,0 ; 47.75,103 cw(c47.75,104) 47.75,105 ; -2,2.54 ccw(c2.54,2.54) 2.54,-2 48.26,-2 ccw(c48.26,2.54) 52.8,2.54 52.8,100.46 ccw(c48.26,100.46) 48.26,105 2.54,105 ccw(c2.54,100.46) -2,100.46 -2,2.54 ; 0,2.54 ccw(c2.54,2.54) 2.54,0 48.26,0 ccw(c48.26,2.54) 50.8,2.54 50.8,100.46 ccw(c48.26,100.46) 48.26,103 2.54,103 ccw(c2.54,100.46) 0,100.46 0,2.54
M11 Gerber Spec:
  drawing of 235 lines, arcs and shapes, not listed
  text "PCB requirements" at 128.155,125.765 h1
  text "List of Gerber files" at 171.555,125.765 h1
  text "Parameter" at 125.655,122.765 h1
  text "Value" at 144.755,122.765 h1
  text "File" at 164.455,122.765 h1
  text "No." at 158.155,121.765 h1
  text "Description" at 176.955,121.765 h1
  text "Generated" at 193.555,121.765 h1
  text "extension" at 162.155,120.665 h1
  text "Material" at 114.755,119.765 h1
  text "FR-4 (Tg 140)" at 137.755,119.765 h1
  text "Number of layers" at 114.755,116.765 h1
  text "4" at 137.755,116.765 h1
  text "1." at 158.355,116.765 h1
  text "GTP" at 165.055,116.765 h1
  text "Top Solder Paste" at 172.055,116.765 h1
  text "Board thickness" at 114.755,113.765 h1
  text "1.6 (±0.1) mm" at 137.755,113.765 h2.2
  text "2." at 158.355,113.765 h1
  text "GTO" at 165.055,113.765 h1
  text "Top Overlay (Silk)" at 172.055,113.765 h1
  text "Solder mask" at 114.755,110.765 h1
  text "Black" at 137.755,110.765 h1
  text "3." at 158.555,110.765 h1
  text "GTS" at 165.055,110.765 h1
  text "Top Solder Mask" at 172.055,110.765 h1
  text "HAL (with lead)" at 141.055,107.765 h1
  text "4." at 158.555,107.765 h1
  text "GTL" at 165.055,107.765 h1
  text "Top Layer" at 172.055,107.765 h1
  text "Surface finishing" at 114.755,104.765 h1
  text "HAL (lead-free)" at 141.055,104.765 h1
  text "5." at 158.555,104.765 h1
  text "G1" at 165.055,104.765 h1
  text "Mid Layer 1" at 172.055,104.765 h1
  text "ENIG" at 141.055,101.765 h1
  text "6." at 158.555,101.765 h1
  text "G2" at 165.055,101.765 h1
  text "Mid Layer 2" at 172.055,101.765 h1
  text "other:" at 141.055,98.765 h1
  text "7." at 158.555,98.765 h1
  text "GBL" at 165.055,98.765 h1
  text "Bottom Layer" at 172.055,98.765 h1
  text "Silkscreen top" at 114.755,95.765 h1
  text "White" at 137.755,95.765 h1
  text "8." at 158.555,95.765 h1
  text "GBS" at 165.055,95.765 h1
  text "Bottom Solder Mask" at 172.055,95.765 h1
  text "Silkscreen bottom" at 114.755,92.765 h1
  text "White" at 137.755,92.765 h1
  text "9." at 158.555,92.765 h1
  text "GBO" at 165.055,92.765 h1
  text "Bottom Overlay (Silk)" at 172.055,92.765 h1
  text "Min. track/spacing" at 114.755,89.765 h1
  text "0.15 mm" at 137.755,89.765 h1
  text "10." at 158.555,89.765 h1
  text "GBP" at 165.055,89.765 h1
  text "Bottom Solder Paste" at 172.055,89.765 h1
  text "Min. hole size" at 114.755,86.765 h1
  text "0.3 mm" at 137.755,86.765 h1
  text "11." at 158.555,86.765 h1
  text "GM10" at 165.055,86.765 h1
  text "Bottom PSM" at 172.055,86.765 h1
  text "Board dimension" at 114.755,83.765 h1
  text "103x50.8 (±0.2) mm" at 137.755,83.765 h2.2
  text "12." at 158.555,83.765 h1
  text "GM15" at 165.055,83.765 h1
  text "Board Layer" at 172.055,83.765 h1
  text "Panelization" at 114.755,80.765 h1
  text "No" at 137.755,80.765 h1
  text "13." at 158.555,80.765 h1
  text "GM8" at 165.055,80.765 h1
  text "Milling" at 172.055,80.765 h1
  text "RoHS compatibility" at 114.755,77.765 h1
  text "Yes" at 137.755,77.765 h1
  text "14." at 158.555,77.765 h1
  text "GM9" at 165.055,77.765 h1
  text "V-Cut" at 172.055,77.765 h1
  text "Number of Gerber Files" at 114.755,74.765 h1
  text "15" at 137.755,74.765 h1
  text "15." at 158.555,74.765 h1
  text "TXT" at 165.055,74.765 h1
  text "Round holes" at 172.055,74.765 h1
  text "16." at 158.555,71.765 h1
  text "TXT" at 165.055,71.765 h1
  text "Slot holes" at 172.055,71.765 h1
  text "17." at 158.555,68.765 h1
  text "TX1" at 165.055,68.765 h1
  text "Round holes" at 172.055,68.765 h1
  text "18." at 158.555,65.765 h1
  text "DRR" at 165.055,65.765 h1
  text "NCDrill file report" at 172.055,65.765 h1
  text "19." at 158.555,62.765 h1
  text "GM11" at 165.055,62.765 h1
  text "Gerbers Specification" at 172.055,62.765 h1
  text "20." at 158.555,59.765 h1
  text "GM16" at 165.055,59.765 h1
  text "Sheet Top" at 172.055,59.765 h1
  text "Additional requests" at 124.755,47.315 h1
  text "Via in pad" at 133.755,44.315 h1
  text "Half holes/castellated edges" at 133.755,41.315 h1
  text "Plated edge" at 133.755,38.315 h1
  text "Impedance control" at 133.755,35.315 h1
  text "Blind vias" at 133.755,32.315 h1
  text "Other:" at 133.755,27.815 h1
  text "Layer stack up details" at 147.355,16.115 h1
  text "Copper" at 145.755,13.115 h1
  text "Dielectric" at 155.555,13.115 h1
  text "Dielectric" at 168.555,13.115 h1
  text "Dielectric" at 180.855,13.115 h1
  text "Layer name" at 127.755,12.115 h1
  text "thickness" at 144.055,10.715 h1
  text "height" at 157.355,10.715 h1
  text "material" at 169.455,10.715 h1
  text "type" at 183.755,10.715 h1
  text "Top Layer (GTL)" at 124.755,4.115 h1
  text "0.035 mm" at 144.555,4.115 h1
  text "0.1 mm" at 157.255,1.115 h1
  text "FR-4" at 170.355,1.115 h1
  text "Prepreg" at 182.355,1.115 h1
  text "Mid Layer 1 (G1)" at 124.755,-1.885 h1
  text "0.0175 mm" at 144.555,-1.885 h1
  text "1.265 mm" at 157.255,-4.885 h1
  text "FR-4" at 170.355,-4.885 h1
  text "Core" at 182.355,-4.885 h1
  text "Mid Layer 2 (G2)" at 124.755,-7.885 h1
  text "0.0175 mm" at 144.555,-7.885 h1
  text "0.1 mm" at 157.255,-10.885 h1
  text "FR-4" at 170.355,-10.885 h1
  text "Prepreg" at 182.355,-10.885 h1
  text "Bottom Layer (GBL)" at 124.755,-13.885 h1
  text "0.035 mm" at 144.555,-13.885 h1
  text "Gerber specification" at 143.75,-29.785 h1.52
  text "PART NO.:" at 129.87,-40.43 h1.14
  text ".PCB_Num" at 143.25,-41.535 h1.52
M13 Assy Top Comm:
  text "Assembly drawing comments - TOP" at 143.75,-29.685 h1.52
  text "BOM NO.:" at 129.87,-40.43 h1.14
  text ".PCBA_BOM_Num" at 143.25,-41.535 h1.52
M14 Assy Bot Comm:
  text "Assembly drawing comments - BOTTOM" at -16.125,-29.775 h1.52
  text ".PCBA_BOM_Num" at -15.625,-41.525 h1.52
M15 Board Outline:
  the board outline again, w0.2
M16 Sheet Top:
  drawing of 42 lines, arcs and shapes, not listed
  text "1" at -46.004,131.386 h1.78
  text "2" at 26.64,131.386 h1.78
  text "3" at 99.792,131.386 h1.78
  text "4" at 172.69,131.386 h1.78
  text "This document is the exclusive property of Byte Lab Grupa d.o.o. Company and it should not be distributed or" at -75.388,126.433 h1.52
  text "reproduced into any other format without prior permission from Byte Lab Grupa d.o.o." at -75.007,123.004 h1.52
  text "A" at -80.345,108.374 h1.78
  text "A" at 206.675,108.374 h1.78
  text "B" at -80.345,60.317 h1.78
  text "B" at 206.675,60.317 h1.78
  text "C" at -80.345,11.803 h1.78
  text "C" at 206.58,11.803 h1.78
  text "SIGNATURE" at 105.475,-25.025 h1.14
  text "TITLE:" at 129.845,-25.215 h1.14
  text "AUTHOR:" at 91.475,-29.125 h1.14
  text ".PCB_Author" at 105.475,-29.168 h1.52
  text "ACCEPTOR:" at 91.475,-34.075 h1.14
  text ".PCB_Acceptor" at 105.475,-34.075 h1.52
  text "D" at -80.345,-36.203 h1.78
  text "D" at 206.58,-36.203 h1.78
  text "Byte Lab Grupa d.o.o." at 65.325,-43.695 h1.65
  text "Medarska 69/1" at 65.325,-46.235 h1.65
  text "FORMAT:" at 183.185,-48.075 h1.14
  text "10000 Zagreb" at 65.325,-48.775 h1.65
  text "DESIGN DOCUMENT / NAME:" at 91.618,-49.702 h1.14
  text "'.HW_E_Doc_Num' '.Module_Name' Rev. '.HW_E_Doc_Rev'" at 108.475,-50.025 h1.52
  text "A4" at 191.725,-50.275 h1.52
  text "Croatia" at 65.325,-51.315 h1.65
  text "1" at -46.004,-56.574 h1.78
  text "2" at 26.64,-56.574 h1.78
  text "3" at 99.792,-56.574 h1.78
  text "4" at 172.69,-56.574 h1.78
Drill Drawing:
  circle w0.254: c-79.418,178.028 r0.733
  lines w0.254: -80.151,150.902 -79.418,151.268 -78.684,150.902 -79.051,151.635 -78.684,152.368 -79.418,152.001 -80.151,152.368 -79.784,151.635 -80.151,150.902 ; -80.151,155.667 -78.684,155.667 -79.418,154.201 -80.151,155.667 ; -80.151,161.166 -79.784,161.166 -79.784,160.799 -79.051,160.799 -79.051,161.166 -78.684,161.166 -78.684,161.899 -79.051,161.899 -79.051,162.266 -79.784,162.266 -79.784,161.899 -80.151,161.899 -80.151,161.166 ; -80.151,167.398 -80.151,167.764 -79.784,168.131 -80.151,168.497 -80.151,168.864 -79.784,168.864 -79.418,168.497 -79.051,168.864 -78.684,168.864 -78.684,168.497 -79.051,168.131 -78.684,167.764 -78.684,167.398 -79.051,167.398 -79.418,167.764 -79.784,167.398 -80.151,167.398 ; -80.151,171.063 -79.784,171.063 -79.418,170.697 -79.051,171.063 -78.684,171.063 -79.051,171.43 -78.684,171.797 -79.051,171.797 -79.418,172.163 -79.784,171.797 -80.151,171.797 -79.784,171.43 -80.151,171.063 ; -79.858,151.195 -79.418,151.415 -78.978,151.195 -79.198,151.635 -78.978,152.075 -79.418,151.855 -79.858,152.075 -79.638,151.635 -79.858,151.195 ; -79.858,161.312 -79.638,161.312 -79.638,161.092 -79.198,161.092 -79.198,161.312 -78.978,161.312 -78.978,161.752 -79.198,161.752 -79.198,161.972 -79.638,161.972 -79.638,161.752 -79.858,161.752 -79.858,161.312 ; -79.858,167.691 -79.858,167.911 -79.638,168.131 -79.858,168.351 -79.858,168.571 -79.638,168.571 -79.418,168.351 -79.198,168.571 -78.978,168.571 -78.978,168.351 -79.198,168.131 -78.978,167.911 -78.978,167.691 -79.198,167.691 -79.418,167.911 -79.638,167.691 -79.858,167.691
  lines w0.381: -81.477,146.613 -2.161,146.613 ; -81.477,179.605 -2.161,179.605 ; -69.251,143.313 -69.251,182.904 ; -55.99,143.313 -55.99,182.904 ; -30.635,143.313 -30.635,182.904 ; -19.4,143.313 -19.4,182.904 ; -81.477,143.313 -2.161,143.313 -2.161,182.904 -81.477,182.904 -81.477,143.313
  text "Symbol" at -79.497,180.594 h1.58
  text "Count" at -68.261,180.594 h1.58
  text "Hole Size" at -55,180.594 h1.58
  text "Plated" at -29.645,180.594 h1.58
  text "Hole Type" at -18.41,180.594 h1.58
  text "506" at -68.261,177.295 h1.32
  text "0.300mm (11.81mil)" at -55,177.295 h1.32
  text "PTH" at -29.645,177.295 h1.32
  text "Round" at -18.41,177.295 h1.32
  text "2" at -68.261,173.996 h1.32
  text "0.500mm (19.69mil)" at -55,173.996 h1.32
  text "PTH" at -29.645,173.996 h1.32
  text "Slot" at -18.41,173.996 h1.32
  text "B" at -80.16,173.742 h1.47
  text "40" at -68.261,170.697 h1.32
  text "0.800mm (31.50mil)" at -55,170.697 h1.32
  text "NPTH" at -29.645,170.697 h1.32
  text "Round" at -18.41,170.697 h1.32
  text "28" at -68.261,167.398 h1.32
  text "1.000mm (39.37mil)" at -55,167.398 h1.32
  text "PTH" at -29.645,167.398 h1.32
  text "Round" at -18.41,167.398 h1.32
  text "1" at -68.261,164.098 h1.32
  text "1.100mm (43.31mil)" at -55,164.098 h1.32
  text "NPTH" at -29.645,164.098 h1.32
  text "Round" at -18.41,164.098 h1.32
  text "C" at -80.16,163.845 h1.47
  text "50" at -68.261,160.799 h1.32
  text "1.100mm (43.31mil)" at -55,160.799 h1.32
  text "PTH" at -29.645,160.799 h1.32
  text "Round" at -18.41,160.799 h1.32
  text "1" at -68.261,157.5 h1.32
  text "1.600mm (62.99mil)" at -55,157.5 h1.32
  text "NPTH" at -29.645,157.5 h1.32
  text "Round" at -18.41,157.5 h1.32
  text "D" at -80.16,157.246 h1.47
  text "4" at -68.261,154.201 h1.32
  text "2.540mm (100.00mil)" at -55,154.201 h1.32
  text "NPTH" at -29.645,154.201 h1.32
  text "Round" at -18.41,154.201 h1.32
  text "4" at -68.261,150.902 h1.32
  text "3.300mm (129.92mil)" at -55,150.902 h1.32
  text "NPTH" at -29.645,150.902 h1.32
  text "Round" at -18.41,150.902 h1.32
  text "1" at -68.261,147.602 h1.32
  text "3.700mm (145.67mil)" at -55,147.602 h1.32
  text "PTH" at -29.645,147.602 h1.32
  text "Round" at -18.41,147.602 h1.32
  text "A" at -80.16,147.349 h1.47
  text "637 Total" at -68.261,144.303 h1.32
  text "Slot definitions :" at -79.497,141.046 h1.32
  text "Routed Path Length" at -56.688,141.046 h1.32
  text "= Calculated from tool start centre position to tool end centre position." at -32.34,141.046 h1.32
  text "Hole Length" at -56.688,138.779 h1.32
  text "= Routed Path Length + Tool Size = Slot length as defined in the PCB layout" at -41.355,138.779 h1.32